# EAGLE board komagoma-2 (EAGLE 9.6.2)
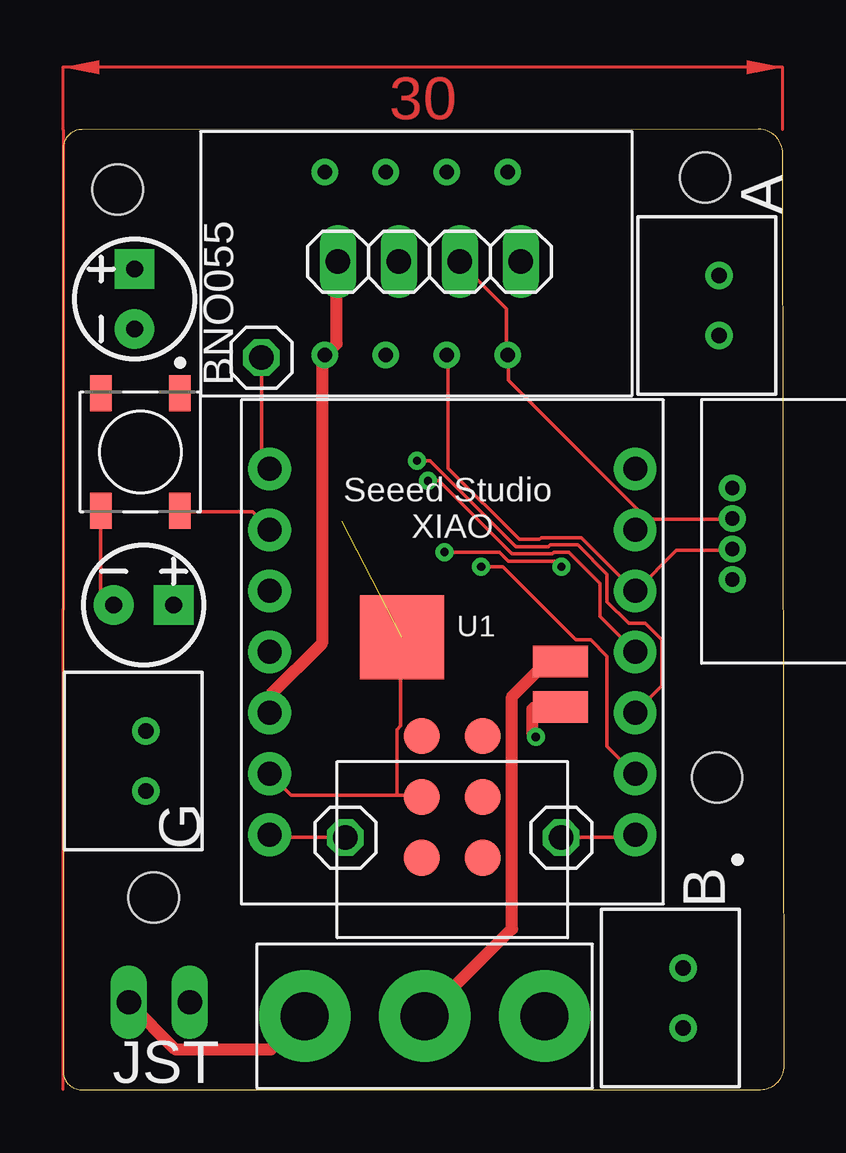
[diagram p0: board, top side]
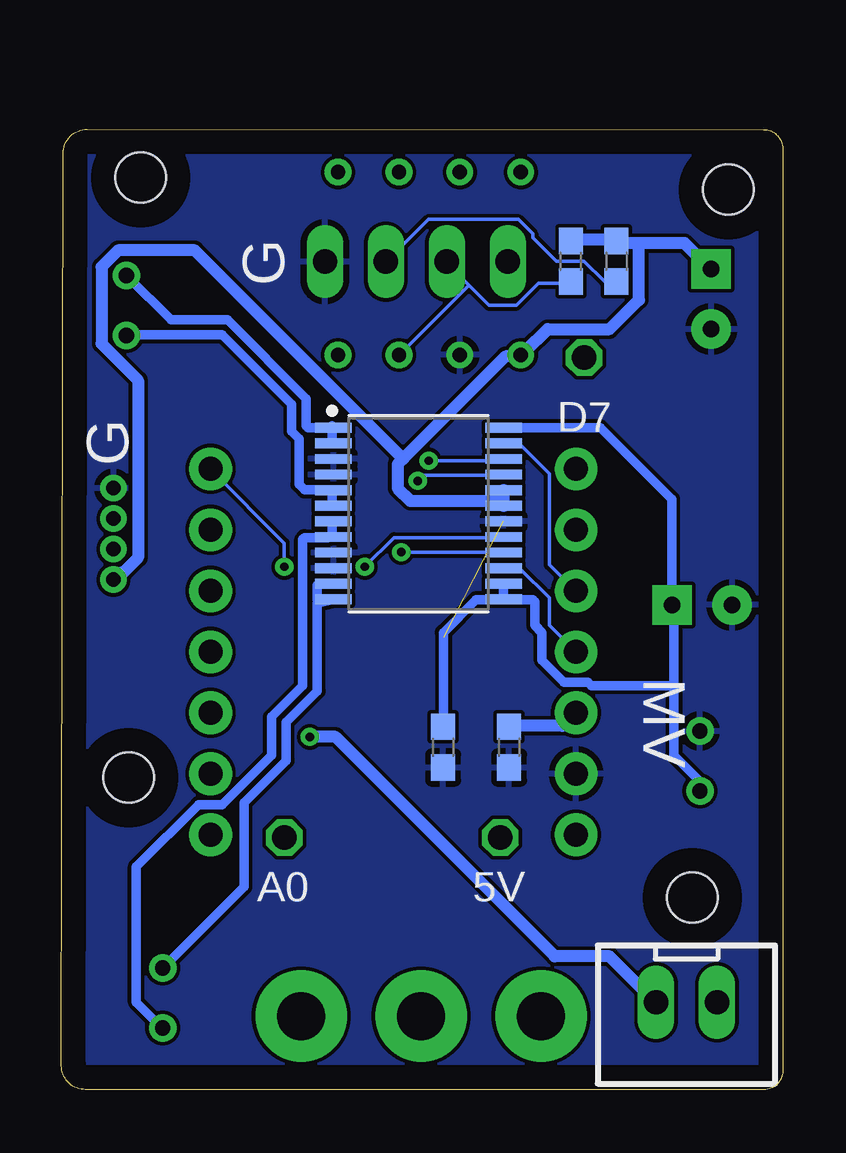
[diagram p1: board, bottom side, seen from below]

Size 30.07 x 40.01 mm. Coordinates in mm from the lower left corner, seen from the top.
Outline: 0.77,0 29.07,0 arc90 30.07,1 30,39 arc90 28.99,40.01 0.79,40 arc90 0,39.21 0,0.77 arc90 0.77,0
Copper layers (1*16): Top 0.035mm / dielectric 1.5mm / Bottom 0.035mm
Design rules "default": minimum track width 6mil, minimum drill 0.35mm, track to track 6mil, track to pad 6mil, pad to pad 6mil, via to via 6mil, smd to smd 6mil, copper to edge 40mil, drill to drill 6mil, minimum pad ring 10mil, minimum via ring 8mil, stop-mask expansion 4mil, vias tented up to drill 0mil, thermal gap 10mil
Net classes: 0 default: width 0.15 mm; 2 battery: width 0.5 mm; 3 VM: width 0.4 mm
Holes 2.1 mm at 2.27,37.5 26.77,38 27.27,13 3.77,8

## Footprints (pad centres in the part's own frame; a part is rotated, then mirrored left to right if it is on the bottom)
1X01 = drill 1.016 octagon: 1 0,0
CPOL-RADIAL-2.5MM-5MM-KIT = drill 0.7 pad 1.651 square: 1 1.25,0 | drill 0.7 pad 1.651: 2 -1.25,0
C1608 = smd 1.1 x 1: 1 -0.85,0; 2 0.85,0
AKIZUKI_SWITCH = drill 2 pad 3.81: 1 0,0; 2 10,0; GND 5,0
WS2812B = smd 1.5 x 0.9: 1 -2.45,1.65; 2 -2.45,-1.65; 3 2.45,-1.65; 4 2.45,1.65
SOP65P760X160-24N = smd 1.515 x 0.409: 1 -3.548,3.575; 2 -3.548,2.925; 3 -3.548,2.275; 4 -3.548,1.625; 5 -3.548,0.975; 6 -3.548,0.325; 7 -3.548,-0.325; 8 -3.548,-0.975; 9 -3.548,-1.625; 10 -3.548,-2.275; 11 -3.548,-2.925; 12 -3.548,-3.575; 13 3.548,-3.575; 14 3.548,-2.925; 15 3.548,-2.275; 16 3.548,-1.625; 17 3.548,-0.975; 18 3.548,-0.325; 19 3.548,0.325; 20 3.548,0.975; 21 3.548,1.625; 22 3.548,2.275; 23 3.548,2.925; 24 3.548,3.575
1X04 = drill 1.016 long: 1 -3.81,0; 2 -1.27,0; 3 1.27,0; 4 3.81,0
0603 = smd 1.1 x 1: 1 -0.85,0; 2 0.85,0
XIAO-ESP32C3-THRUHOLE = smd 1.5 x 1.5: 15 -1.27,8.58; 16 1.27,8.58; 17 -1.27,6.04; 18 1.27,6.04; 19 -1.27,3.5; 20 1.27,3.5 | smd 2.3 x 1.3: 21 -4.5,2.3; 22 -4.5,0.4 | smd 3.5 x 3.5: 23 2.1,-0.6 | drill 1 pad 1.778: P$1 -7.62,7.62; P$2 -7.62,5.08; P$3 -7.62,2.54; P$4 -7.62,0; P$5 -7.62,-2.54; P$6 -7.62,-5.08; P$7 -7.62,-7.62; P$8 7.62,-7.62; P$9 7.62,-5.08; P$10 7.62,-2.54; P$11 7.62,0; P$12 7.62,2.54; P$13 7.62,5.08; P$14 7.62,7.62
BNO055 = drill 0.6: P$1 -3.81,3.81; P$2 -3.81,1.27; P$3 -3.81,-1.27; P$4 -3.81,-3.81; P$5 3.81,-3.81; P$6 3.81,-1.27; P$7 3.81,1.27; P$8 3.81,3.81
S11059 = drill 0.6: P$1 0,1.905; P$2 0,0.635; P$3 0,-0.635; P$4 0,-1.905
JST-XH-02-PACKAGE-LONG-PAD = drill 1.016 long: 1 -1.27,0; 2 1.27,0
B2B-XH-A = drill 0.64: 1 0,0; 2 2.5,0

## Placement (x,y rotation side)
5V  PINHD-1X1  [1X01]  11.77,10.5 0 top
A0  PINHD-1X1  [1X01]  20.77,10.5 0 top
C1  10uF  [CPOL-RADIAL-2.5MM-5MM-KIT]  3.36,20.19 0 top
C2  0.1u  [C1608]  14.16,14.27 270 bottom
C3  0.1u  [C1608]  11.4,14.27 270 bottom
C4  10uF  [CPOL-RADIAL-2.5MM-5MM-KIT]  2.98,32.94 90 top
CONNECTOR1  AKIZUKI_SWITCH_SOCKETAKIZUKI_SWITCH_SOCKET  [AKIZUKI_SWITCH]  10.08,3.06 0 top
D1  WS2812B  [WS2812B]  3.22,26.57 270 top
D7  PINHD-1X1  [1X01]  8.27,30.5 0 top
IC1  TB6612FNGSSOP24  [SOP65P760X160-24N]  15.18,24 0 bottom
JP1  PINHD-1X4  [1X04]  15.27,34.5 0 top
R1  10k  [0603]  8.84,34.52 90 bottom
R2  10k  [0603]  6.92,34.52 90 bottom
U1  XIAO-ESP32C3A  [XIAO-ESP32C3-THRUHOLE]  16.23,18.24 180 top
U$1  BNO055  [BNO055]  14.73,34.42 90 top
U$2  S11059  [S11059]  27.9,23.15 0 top
X1  JST-XH-02-PIN-LONG-PAD  [JST-XH-02-PACKAGE-LONG-PAD]  4.01,3.64 180 bottom
XH  3A/250V  [B2B-XH-A]  27.35,33.92 270 top
XH1  3A/250V  [B2B-XH-A]  25.85,5.06 270 top
XH2  3A/250V  [B2B-XH-A]  3.45,14.94 270 top

## Library data of the parts
5V A0 D7 JP1 = Connector; CATEGORY: CONNECTOR; SUB-CATEGORY: PIN-HEADER
C1 C4 = SparkFun-Capacitors; PROD_ID: CAP-08440
C2 C3 = resistor
CONNECTOR1 = Akizuki_Switch
D1 = LED; CATEGORY: LED; COLOR: RGB; DESCRIPTION: LED integrated light source; MANUFACTURER: Worldsemi; MPN: WS2812B; OPERATING_TEMP: -25 ℃ to +80℃(TJ); PART_STATUS: Active; SUB_CATEGORY: RGB
IC1 = IC_Power-Management; CATEGORY: IC_Power-Management; MANUFACTURER: Toshiba; MPN: TB6612FNG,C,8,EL; OPERATING_TEMP: -20 to +85 °C; PART_STATUS: Active; ROHS_COMPLIANT: Compliant; SUB-CATEGORY: Motor Driver; THERMALLOSS: 0.78W
R1 R2 = SparkFun-Resistors; PROD_ID: RES-00824
U1 = Seeed Studio XIAO Series
U$1 U$2 = UTlibraries
X1 = Rembrandt Electronics - JST XH Connectors v1-0
XH XH1 XH2 = Connector; CATEGORY: CONNECTOR; DESCRIPTION: 2.5mm pitch/disconnectable crimp style connector; MANUFACTURER: JST (XH CONNECTOR); MPN: B2B-XH-A; OPERATING_TEMPERATURE: -25°C ~ 85°C; PART_STATUS: ACTIVE; ROHS_COMPLIANT: COMPLIANT; SERIES: B_B-XH-A; SUB_CATEGORY: Through hole connector; TYPE: top entry

## Nets
5V: 5V.1 U1.P$14
+3V3 [battery]: C3.1 C4.1 IC1.19 IC1.20 JP1.1 R1.2 R2.2 U1.P$12 U$1.P$1 U$2.P$4
+5V [battery]: D1.1
A0: A0.1 U1.P$1
AO1 [VM]: IC1.1 IC1.2 XH.1
AO2 [VM]: IC1.5 IC1.6 XH.2
BAT+ [battery]: CONNECTOR1.GND U1.22
BAT- [battery]: U1.21 X1.2
BATT [battery]: CONNECTOR1.1 X1.1
BO1 [VM]: IC1.11 IC1.12 XH1.1
BO2 [VM]: IC1.7 IC1.8 XH1.2
D7: D7.1 U1.P$8
GND: C1.2 C2.2 C3.2 C4.2 D1.3 IC1.3 IC1.4 IC1.9 IC1.10 IC1.18 JP1.4 U1.18 U1.23 U1.P$13 U$1.P$2 U$2.P$1 XH2.1
N$3: IC1.21 U1.P$4
N$6: IC1.22 U1.P$3
N$8: IC1.17 U1.P$2
N$9: IC1.16 U1.P$7
N$10: IC1.15 U1.P$11
N$11: IC1.23 U1.P$10
N$12: D1.4 U1.P$9
SCL: JP1.3 R2.1 U1.P$6 U$1.P$4 U$2.P$2
SDA: JP1.2 R1.1 U1.P$5 U$1.P$3 U$2.P$3
VM [VM]: C1.1 C2.1 IC1.13 IC1.14 IC1.24 XH2.2

## Tracks (layer width: path | path; a pad name or v marks a point on that pad's centre or on a via)
5V
  Top 0.152: 5V.1 11.71,10.51 8.74,10.51 8.66,10.58 U1.P$14
+3V3
  Top 0.5: JP1.1 11.4,34.43 11.4,31.08 10.95,30.62 U$1.P$1 10.79,30.39 10.79,18.58 8.66,16.45 8.66,15.76 U1.P$12
  Bottom 0.5: R1.2 8.81,35.42 6.98,35.42 R2.2 6.68,35.27 5.99,35.27 | 5.99,35.27 4.09,35.27 3.02,34.2 C4.1 | C3.1 11.33,15.15 9.2,15.15 8.66,15.69 U1.P$12 | IC1.20 11.63,24.91 11.63,24.38 IC1.19 11.86,24.53 15.52,24.53 16.05,25.06 16.05,26.05 15.82,26.28 | 15.82,26.28 11.56,30.55 10.95,30.55 U$1.P$1 10.72,30.77 9.8,31.69 7.21,31.69 5.99,32.91 5.99,35.27 | 15.82,26.28 24.51,34.97 27.71,34.97 28.4,34.28 28.4,31.08 26.87,29.56 26.87,22.16 27.48,21.55 27.56,21.55 27.86,21.25 U$2.P$4
A0
  Top 0.152: A0.1 23.75,10.51 23.82,10.58 U1.P$1
AO1
  Bottom 0.4: IC1.2 18.8,26.96 18.8,27.5 18.87,27.57 18.8,27.65 IC1.1 19.02,27.57 19.79,27.57 19.86,27.65 19.86,28.79 23.14,32.07 25.5,32.07 27.33,33.9 XH.1
AO2
  Bottom 0.4: IC1.6 18.8,24.38 18.8,24.91 IC1.5 18.95,24.98 19.94,24.98 20.17,25.21 20.17,27.12 20.47,27.42 20.47,28.57 23.37,31.46 27.33,31.46 XH.2
BAT+
  Top 0.5: U1.22 20.7,17.82 20.17,17.82 18.72,16.37 18.72,6.7 15.14,3.12 CONNECTOR1.GND
BAT-  (via drill 0.35)
  Top 0.5: v19.71,14.7 19.56,14.85 19.56,15.84 19.63,15.92 20.7,15.92 U1.21
  Bottom 0.5: v19.71,14.7 18.64,14.7 9.5,5.55 7.21,5.55 5.31,3.65 X1.2
BATT
  Top 0.5: X1.1 2.79,3.57 4.7,1.67 8.66,1.67 10.03,3.04 CONNECTOR1.1
BO1
  Bottom 0.4: IC1.11 18.8,21.1 19.33,21.1 19.41,21.02 19.41,20.41 18.8,20.41 IC1.12 19.41,20.26 19.41,16.6 20.7,15.31 20.7,13.71 22.45,11.95 22.45,8.45 25.81,5.1 XH1.1
BO2
  Bottom 0.4: IC1.7 18.8,23.61 18.8,23.08 IC1.8 18.95,23 19.94,23 20.02,22.93 20.02,16.83 21.31,15.54 21.31,13.94 23.37,11.88 24.36,11.88 26.95,9.29 26.95,3.65 25.88,2.58 XH1.2
D7
  Top 0.152: D7.1 8.28,30.47 8.28,26.2 8.59,25.9 U1.P$8
GND  (1 unrouted)
  Top 0.152: 13.92,12.26 9.5,12.26 8.66,13.1 U1.P$13 | 13.92,12.26 14.91,12.26 U1.18 | D1.3 1.57,24.07 1.57,20.72 2.03,20.26 C1.2 | 13.92,12.26 13.92,15 14.07,15.15 14.07,18.81 U1.23
  pour Bottom: -3.73,42 -3.73,-1 -1.23,-3.5 29.27,-3.5 34.77,2 34.77,39.5 31.77,42.5 -3.23,42.5
N$3  (via drill 0.35)
  Top 0.152: v15.21,25.36 15.67,25.36 18.72,22.32 20.4,22.32 20.47,22.39 21.08,22.39 22.38,21.1 22.38,19.73 23.82,18.28 U1.P$4
  Bottom 0.152: v15.21,25.36 14.99,25.59 11.63,25.59 IC1.21
N$6  (via drill 0.35)
  Top 0.152: v14.76,26.2 15.29,26.2 18.87,22.62 20.24,22.62 20.32,22.7 21.46,22.7 22.68,21.48 22.68,20.34 23.6,19.42 24.28,19.42 24.97,18.74 24.97,16.83 23.9,15.76 U1.P$3
  Bottom 0.152: v14.76,26.2 11.63,26.2 IC1.22
N$8  (via drill 0.35)
  Top 0.152: v17.42,21.78 18.34,21.78 21.39,18.74 22,18.74 22.68,18.05 22.68,14.32 23.82,13.17 U1.P$2
  Bottom 0.152: v17.42,21.78 16.21,23 11.63,23 IC1.17
N$9  (via drill 0.35)
  Top 0.152: v15.9,22.39 18.19,22.39 18.57,22.01 20.55,22.01 v20.78,21.78
  Bottom 0.152: v15.9,22.39 11.63,22.39 IC1.16 | v20.78,21.78 20.78,22.77 23.82,25.82 U1.P$7
N$10
  Bottom 0.152: IC1.15 11.56,21.71 10.95,21.71 9.73,20.49 9.73,19.34 8.66,18.28 U1.P$11
N$11
  Bottom 0.152: IC1.23 11.56,26.89 10.95,26.89 9.73,25.67 9.73,21.86 8.66,20.79 U1.P$10
N$12
  Top 0.152: D1.4 4.93,24.07 7.9,24.07 8.59,23.38 U1.P$9
SCL
  Top 0.152: U$2.P$2 27.86,23.77 24.28,23.77 23.9,23.38 U1.P$6 24.21,23.77 24.21,23.92 18.57,29.56 18.57,30.55 U$1.P$4 18.49,30.62 18.49,32.53 16.59,34.43 JP1.3
  Bottom 0.152: R2.1 6.98,33.67 7.44,33.67 8.28,34.51 9.42,34.51 10.41,35.5 10.41,35.65 11.02,36.26 14.76,36.26 16.51,34.51 JP1.3
SDA
  Top 0.152: U$2.P$3 27.86,22.47 25.58,22.47 23.9,20.79 U1.P$5 23.82,20.79 21.61,23 19.94,23 19.86,22.93 19.02,22.93 16.05,25.9 16.05,30.55 U$1.P$3
  Bottom 0.152: 13.08,33.52 13.99,34.43 JP1.2 | 13.08,33.52 12.24,32.68 11.1,32.68 10.18,33.59 8.89,33.59 R1.1 | 13.08,33.52 15.98,30.62 U$1.P$3
VM
  Bottom 0.4: C2.1 14.15,15.15 14.15,19.04 12.78,20.41 11.63,20.41 IC1.13 | IC1.14 11.63,21.02 11.63,20.57 IC1.13 | IC1.24 11.56,27.57 7.6,27.57 4.62,24.6 4.62,20.26 C1.1 4.55,20.03 4.55,16.83 | 4.55,16.83 4.55,13.94 3.48,12.87 3.48,12.49 XH2.2 | 4.55,16.83 7.98,16.83 8.13,16.98 9.12,16.98 10.03,17.9 10.03,19.04 10.34,19.34 10.34,20.34 10.41,20.41 11.48,20.41 IC1.13
(copper drawn outside any net)
  shapes: Top area x2

## Text on the board
tNames: A | G | B | JST
bNames: G | G | VM